# EAGLE board proiect-tsc (EAGLE 9.7.0)
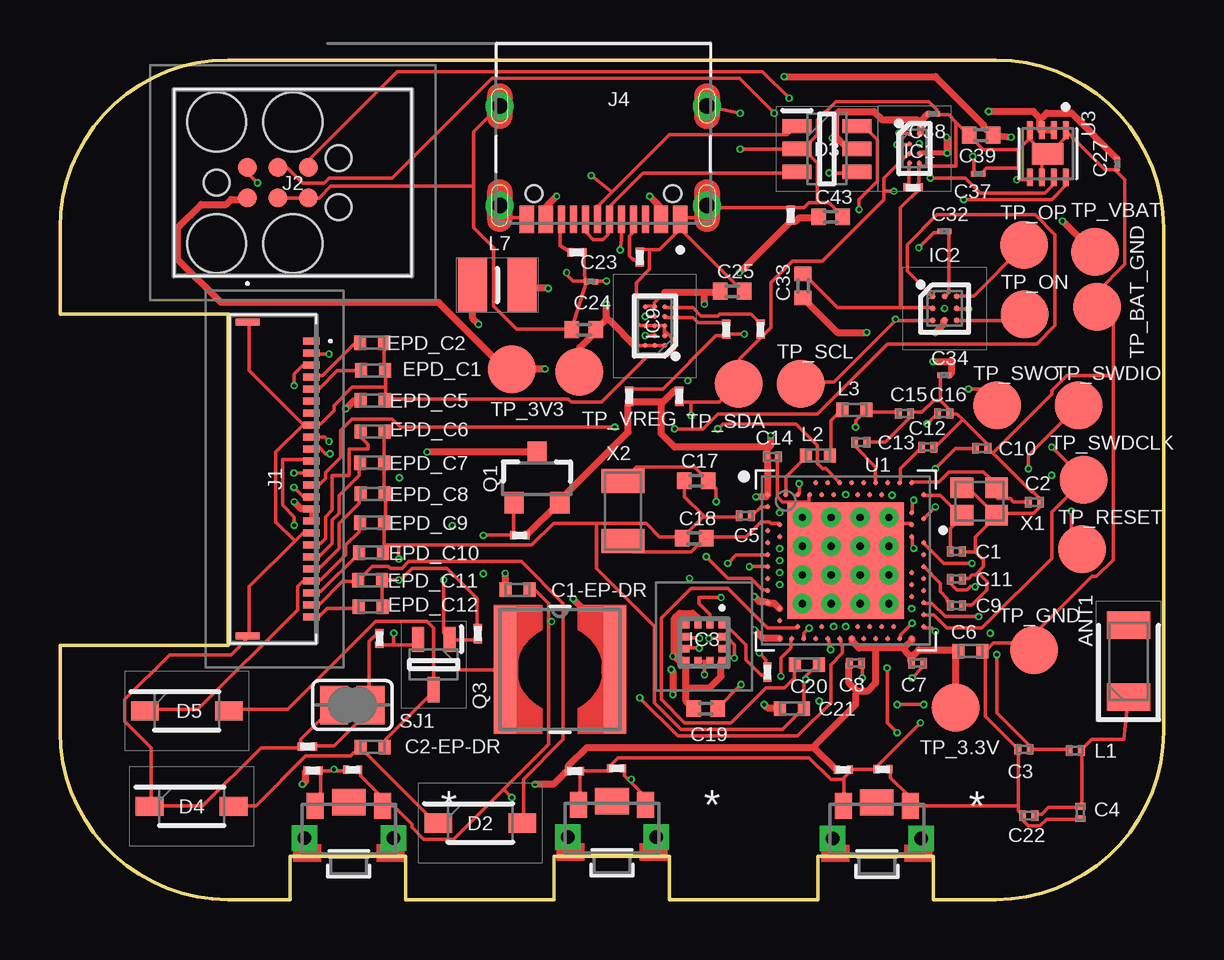
[diagram p0: board, top side]
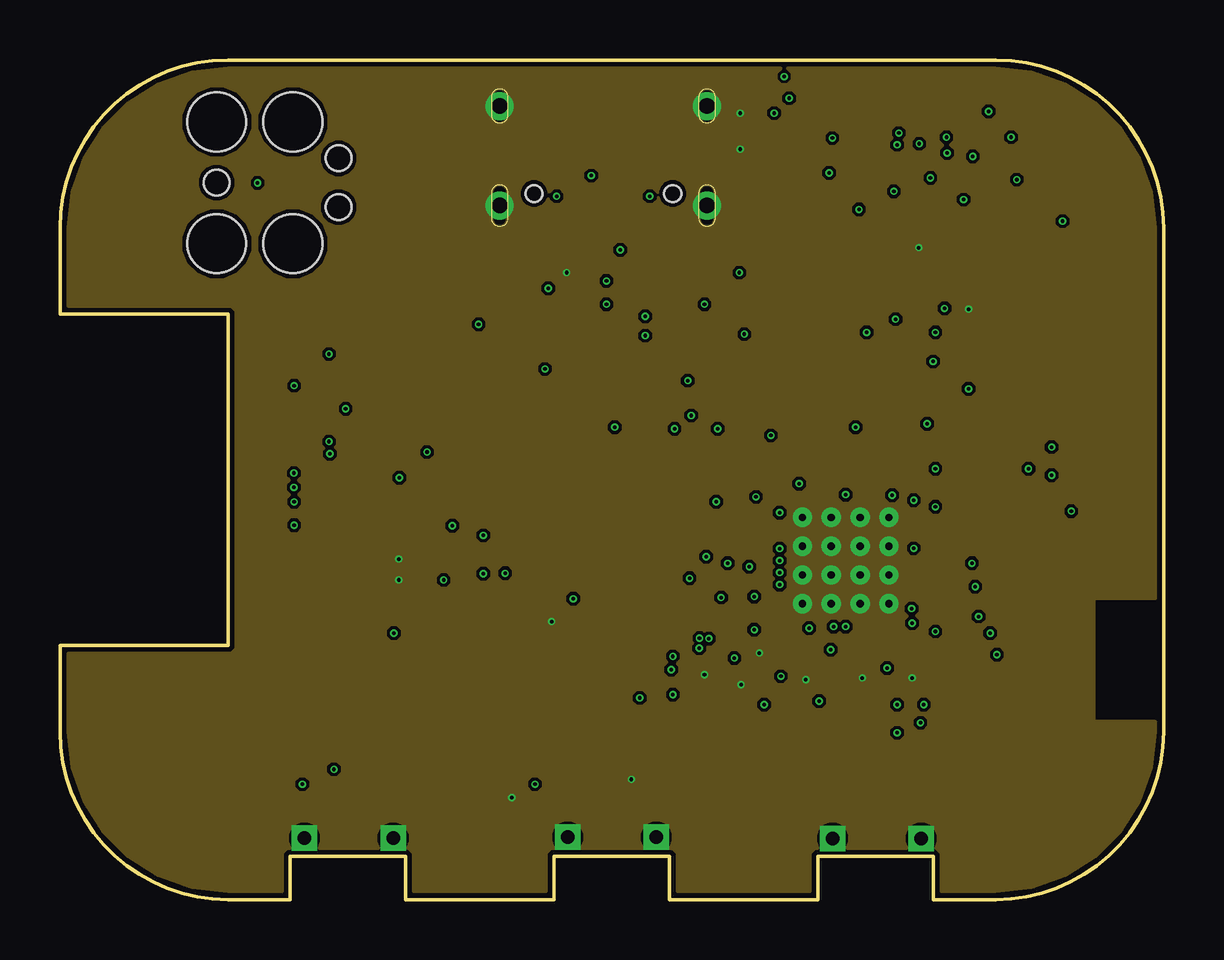
[diagram p1: board, inner layer GND]
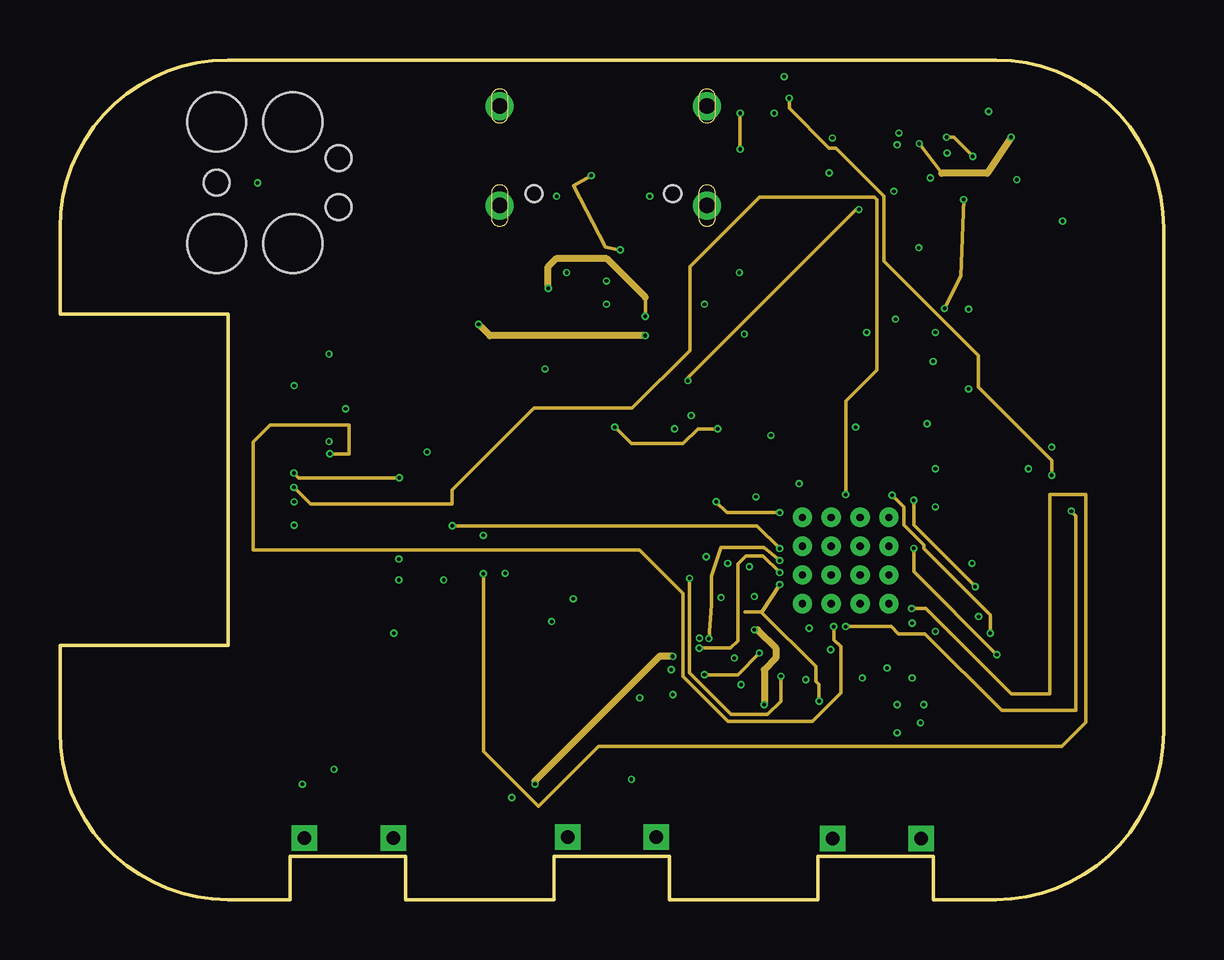
[diagram p2: board, inner layer Route63]
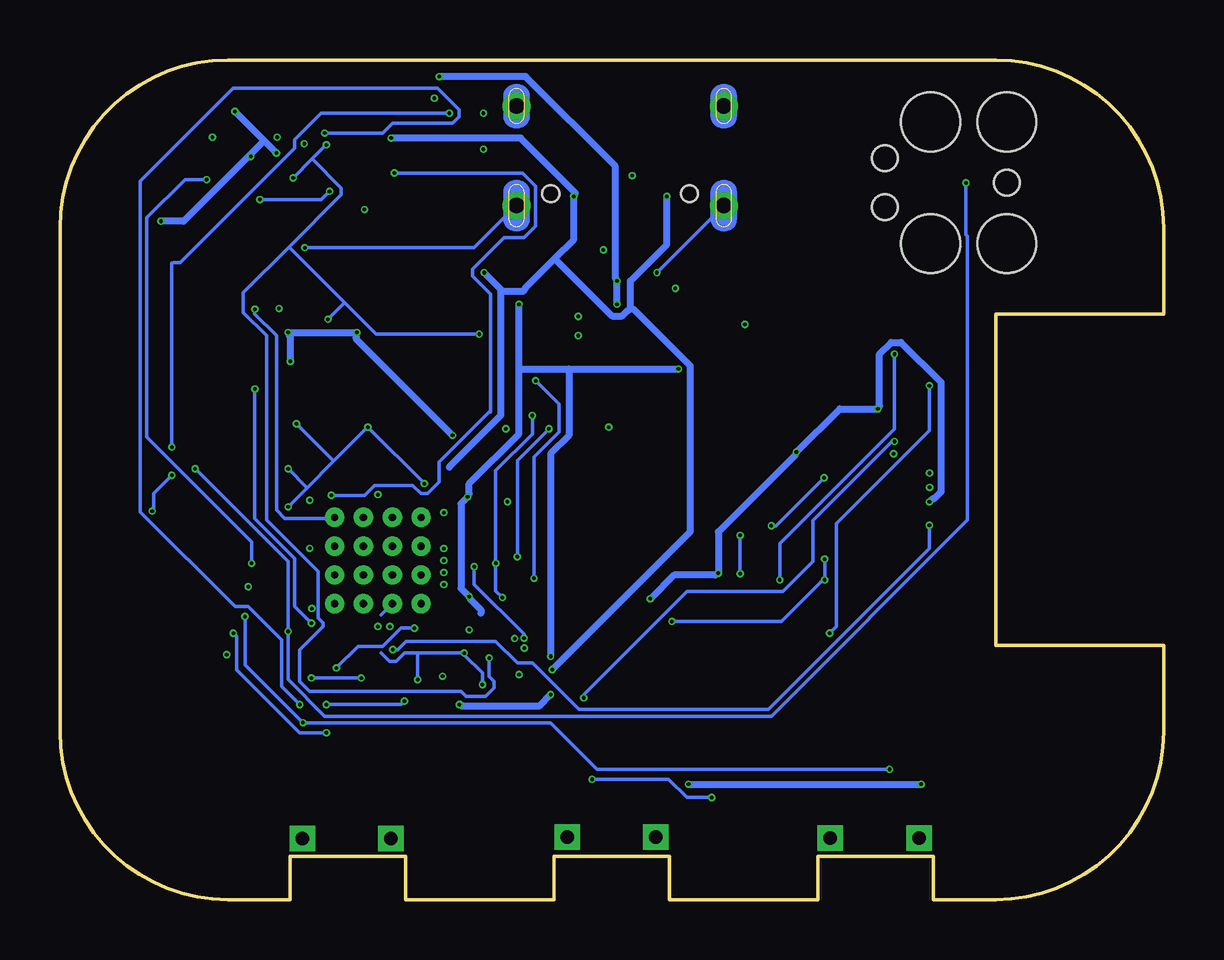
[diagram p3: board, bottom side, seen from below]

Size 46 x 35 mm. Coordinates in mm from the lower left corner, seen from the top.
Outline: 39,0 36.4,0 36.4,1.8 31.6,1.8 31.6,0 25.4,0 25.4,1.8 20.6,1.8 20.6,0 14.4,0 14.4,1.8 9.6,1.8 9.6,0 7,0 arc-90 0,7 0,10.6 7,10.6 7,24.4 0,24.4 0,28 arc-90 7,35 39,35 arc-90 46,28 46,7 arc-90 39,0
Copper layers (1+2*15+16): Top / GND / Route63 / Bottom
Stack-up 4 Layer Stack: Top SilkScreen Epoxy Ink / Top SolderMask SR:Green 0.0254mm Dk 4.3 / Top Surface Finish Lead-Free 0.02mm / Top CuFoil:007 0.035mm / Dielectric-1 Prepreg:001 0.064mm / Dielectric-2 Prepreg:001 0.064mm / GND CuFoil:007 0.035mm / Dielectric-3 User Defined 0.5132mm / Route63 CuFoil:007 0.035mm / Dielectric-4 Prepreg:001 0.064mm / Dielectric-5 Prepreg:001 0.064mm / Bottom CuFoil:007 0.035mm / Bottom Surface Finish Lead-Free 0.02mm / Bottom SolderMask SR:Green 0.0254mm Dk 4.3 / Bottom SilkScreen Epoxy Ink
Design rules: minimum copper width classes=1 0.3mm, minimum copper width 0.15mm, minimum drill size 0.15mm, copper clearance wire_polygon to wire_polygon 5mil, copper clearance wire_polygon to pad_smd 5mil, copper clearance wire_polygon to via 5mil, copper clearance pad_smd to pad_smd 5mil, copper clearance pad_smd to via 5mil, copper clearance via to via 5mil, copper clearance smd to pad (same net) 5mil, copper clearance smd to via (same net) 5mil, copper clearance smd to smd (same net) 5mil, dimension clearance 0.2mm, via restrict clearance 0mil, restrict clearance 0mil, drill distance 6mil, keepout clearance 0mil
Net classes: 1 power: width 0.3 mm
RestrictTop: 4 lines
RestrictBottom: 4 lines
RestrictVias: 4 lines

## Footprints (pad centres in the part's own frame; a part is rotated, then mirrored left to right if it is on the bottom)
2450AT18B100E_ANTC3216X140N = smd 1.15 x 1.8: 1 -1.5,0; 2 1.5,0
NORDIC_NRF_3_RESC0201_L = smd 0.28 x 0.43: 1 -0.255,0; 2 0.255,0
NORDIC_NRF_3_RESC0402_L = smd 0.5 x 0.6: 1 -0.5,0; 2 0.5,0
PERFECT_0402_0402 = smd 0.6 x 0.7: 1 -0.5,0; 2 0.5,0
GRM011R60J152KE01L_2_CAPC0201X13N = smd 0.22 x 0.23: 1 -0.185,0; 2 0.185,0
GRM011R60J152KE01L_1_0201 = smd 0.35 x 0.25: 1 0,0.275; 2 0,-0.275
ESP32_C6_LIBRARY_5_SOD3716X135N = smd 1.15 x 0.8: 1 -1.75,0; 2 1.75,0
ESP32_C6_LIBRARY_3_SOT95P280X145-6N = smd 1.2 x 0.6: 1 -1.25,0.95; 2 -1.25,0; 3 -1.25,-0.95; 4 1.25,-0.95; 5 1.25,0; 6 1.25,0.95
BQ25180YBGR_BGA8C40P2X4_100X155X50 = smd 0.2 x 0.2: A1 -0.2,0.6; A2 0.2,0.6; B1 -0.2,0.2; B2 0.2,0.2; C1 -0.2,-0.2; C2 0.2,-0.2; D1 -0.2,-0.6; D2 0.2,-0.6
DRV2605YZFR_BGA9C50P3X3_144X144X62 = smd 0.25 x 0.25: A1 -0.5,0.5; A2 0,0.5; A3 0.5,0.5; B1 -0.5,0; B2 0,0; B3 0.5,0; C1 -0.5,-0.5; C2 0,-0.5; C3 0.5,-0.5
BMA423_BMA423 = smd 0.3 x 0.35: 1 -0.75,-0.775; 2 -0.25,-0.775; 3 0.25,-0.775; 4 0.75,-0.775; 7 0.75,0.775; 8 0.25,0.775; 9 -0.25,0.775; 10 -0.75,0.775 | smd 0.35 x 0.3: 5 0.775,-0.25; 6 0.775,0.25; 11 -0.775,0.25; 12 -0.775,-0.25
RT6160AWSC_BGA15C40P3X5_140X230X60 = smd 0.216 x 0.216: A1 -0.4,0.8; A2 0,0.8; A3 0.4,0.8; B1 -0.4,0.4; B2 0,0.4; B3 0.4,0.4; C1 -0.4,0; C2 0,0; C3 0.4,0; D1 -0.4,-0.4; D2 0,-0.4; D3 0.4,-0.4; E1 -0.4,-0.8; E2 0,-0.8; E3 0.4,-0.8
503480-2400_5034802400 = smd 0.3 x 0.7: 1 -5.75,1.525; 2 -5.25,1.525; 3 -4.75,1.525; 4 -4.25,1.525; 5 -3.75,1.525; 6 -3.25,1.525; 7 -2.75,1.525; 8 -2.25,1.525; 9 -1.75,1.525; 10 -1.25,1.525; 11 -0.75,1.525; 12 -0.25,1.525; 13 0.25,1.525; 14 0.75,1.525; 15 1.25,1.525; 16 1.75,1.525; 17 2.25,1.525; 18 2.75,1.525; 19 3.25,1.525; 20 3.75,1.525; 21 4.25,1.525; 22 4.75,1.525; 23 5.25,1.525; 24 5.75,1.525 | smd 0.3 x 1: MP1 -6.54,-1.125; MP2 6.54,-1.125
TC2030-IDC_TC2030IDC = smd 0.783 x 0.783: 1 -0.953,-0.635; 2 -0.953,0.635; 3 0.317,-0.635; 4 0.317,0.635; 5 1.588,-0.635; 6 1.588,0.635 | hole 2.451: -2.223,-2.54; -2.223,2.54; 0.952,-2.54; 0.952,2.54 | hole 1.067: -2.223,0; 2.857,-1.016; 2.857,1.016
KH-TYPE-C-16P_KINGHELM_KH-TYPE-C-16P = smd 0.6 x 1.15: A1_B12 -3.2,4.725; A4_B9 -2.4,4.725; A9_B4 2.4,4.725; A12_B1 3.2,4.725 | smd 0.3 x 1.15: A5 -1.25,4.725; A6 -0.25,4.725; A7 0.25,4.725; A8 1.25,4.725; B5 1.75,4.725; B6 0.75,4.725; B7 -0.75,4.725; B8 -1.75,4.725 | drill 0.65 pad 1.05: SH1 -4.32,0; SH2 4.32,0; SH3 -4.32,4.15; SH4 4.32,4.15 | hole 0.7: -2.89,3.65; 2.89,3.65
NORDIC_NRF_2_RESC0201_L = smd 0.28 x 0.43: 1 -0.255,0; 2 0.255,0
NORDIC_NRF_2_RESC0402_L = smd 0.5 x 0.6: 1 -0.5,0; 2 0.5,0
ESP32_C6_LIBRARY_2_IND_4828-WE-TPC_WRE = smd 0.9 x 5.3: 1 -2.286,0; 2 2.286,0
MLP2016SR47MT0S1_INDC2016X100N = smd 1.2 x 2.2: 1 -1.028,0; 2 1.028,0
ESP32_C6_LIBRARY_4_ESP32_C6_LIBRARY_4_ESP32_C6_LIBRARY_4_ESP32_C6_LIBRARY_4_ESP32_WROVER_SPARKFUN-DISCRETESEMI_SOT23-3 = smd 0.8 x 0.9: 1 -0.95,-1; 2 0.95,-1; 3 0,1.1
ESP32_C6_LIBRARY_6_SOT65P210X110-3N = smd 1.05 x 0.5: 1 -1.05,0.65; 2 -1.05,-0.65; 3 1.05,0
CPF0201D7K68C1_0201 = smd 0.35 x 0.25: 1 0,0.275; 2 0,-0.275
ERA-1AEB3401C_0201 = smd 0.35 x 0.25: 1 0,0.275; 2 0,-0.275
ESP32_C6_LIBRARY_7_JUMPER_SJ = smd 1.168 x 1.6: 1 -0.762,0; 2 0.762,0
2025-10-22_07-23-44_LIBRARY_SW_EVP-AKE31A_PAN = smd 0.711 x 1.092: 1 -1.4,-0.972; 2 1.4,-0.972 | drill 0.559 pad 0.914 square: 3 -1.848,0.381; 4 1.848,0.381 | smd 1.397 x 1.092: 5 0,-1.124
HECTOR_WATCH_1_TP20R = smd 2 x 2: TP 0,0
NORDIC_NRF_4_AQFN50P700X700X85_HS-74N = smd 4.85 x 4.85: P$74 0,0 | drill 0.3 pad 0.6: P$75 -1.8,1.8; P$76 -0.6,1.8; P$77 0.6,1.8; P$78 1.8,1.8; P$79 -1.8,0.6; P$80 -0.6,0.6; P$81 0.6,0.6; P$82 1.8,0.6; P$83 -1.8,-0.6; P$84 -0.6,-0.6; P$85 0.6,-0.6; P$86 1.8,-0.6; P$87 -1.8,-1.8; P$88 -0.6,-1.8; P$89 0.6,-1.8; P$90 1.8,-1.8 | smd 0.2 x 0.2: P$A8 -1.25,3.25; P$A10 -0.75,3.25; P$A12 -0.25,3.25; P$A14 0.25,3.25; P$A16 0.75,3.25; P$A18 1.25,3.25; P$A20 1.75,3.25; P$A22 2.25,3.25; P$A23 2.75,3.25; P$AA24 3.25,-2.25; P$AB2 -2.75,-2.5; P$AC5 -2,-2.75; P$AC9 -1,-2.75; P$AC11 -0.5,-2.75; P$AC13 0,-2.75; P$AC15 0.5,-2.75; P$AC17 1,-2.75; P$AC19 1.5,-2.75; P$AC21 2,-2.75; P$AC24 3.25,-2.75; P$AD2 -2.75,-3.25; P$AD4 -2.25,-3.25; P$AD6 -1.75,-3.25; P$AD8 -1.25,-3.25; P$AD10 -0.75,-3.25; P$AD12 -0.25,-3.25; P$AD14 0.25,-3.25; P$AD16 0.75,-3.25; P$AD18 1.25,-3.25; P$AD20 1.75,-3.25; P$AD22 2.25,-3.25; P$AD23 2.75,-3.25; P$B1 -3.25,2.75; P$B3 -2.5,2.75; P$B5 -2,2.75; P$B7 -1.5,2.75; P$B9 -1,2.75; P$B11 -0.5,2.75; P$B13 0,2.75; P$B15 0.5,2.75; P$B17 1,2.75; P$B19 1.5,2.75; P$B24 3.25,2.75; P$C1 -3.25,2.25; P$D2 -2.75,2; P$D23 2.75,2; P$E24 3.25,1.75; P$F2 -2.75,1.5; P$F23 2.75,1.5; P$G1 -3.25,1.25; P$H2 -2.75,1; P$H23 2.75,1; P$J1 -3.25,0.75; P$J24 3.25,0.75; P$K2 -2.75,0.5; P$L1 -3.25,0.25; P$L24 3.25,0.25; P$M2 -2.75,0; P$N1 -3.25,-0.25; P$N24 3.25,-0.25; P$P2 -2.75,-0.5; P$P23 2.75,-0.5; P$R1 -3.25,-0.75; P$R24 3.25,-0.75; P$T2 -2.75,-1; P$T23 2.75,-1; P$U1 -3.25,-1.25; P$U24 3.25,-1.25; P$V23 2.75,-1.5; P$W1 -3.25,-1.75; P$W24 3.25,-1.75; P$Y2 -2.75,-2; P$Y23 2.75,-2
ESP32_C6_LIBRARY_SON50P200X200X80-9N = smd 0.76 x 0.27: 1 -0.985,0.75; 2 -0.985,0.25; 3 -0.985,-0.25; 4 -0.985,-0.75; 5 0.985,-0.75; 6 0.985,-0.25; 7 0.985,0.25; 8 0.985,0.75 | smd 0.9 x 1.3: 9 0,0
NORDIC_NRF_BT-XTAL_2016_N = smd 0.95 x 0.85: 1 -0.725,-0.575; 2 0.725,-0.575; 3 0.725,0.575; 4 -0.725,0.575
NORDIC_NRF_1_XTAL_3215_N = smd 1 x 1.8: 1 -1.25,0; 2 1.25,0

## Placement (x,y rotation side)
ANT1  2450AT18B100E  [2450AT18B100E_ANTC3216X140N]  44.54,9.93 90 top
C1  12pF  [NORDIC_NRF_3_RESC0201_L]  37.36,14.51 0 top
C1-EP-DR  10uF  [NORDIC_NRF_3_RESC0402_L]  19.07,12.91 0 top
C2  12pF  [NORDIC_NRF_3_RESC0201_L]  40.62,16.56 0 top
C2-EP-DR  4.7uF/25V  [NORDIC_NRF_3_RESC0402_L]  13.03,6.36 0 top
C3  1pF  [NORDIC_NRF_3_RESC0201_L]  40.18,6.26 180 top
C4  1pF  [NORDIC_NRF_3_RESC0201_L]  42.53,3.63 270 top
C5  100nF  [NORDIC_NRF_3_RESC0201_L]  28.57,16 180 top
C6  4.7uF  [NORDIC_NRF_3_RESC0402_L]  37.94,10.36 0 top
C7  100nF  [NORDIC_NRF_3_RESC0201_L]  35.75,9.86 0 top
C8  100nF  [NORDIC_NRF_3_RESC0201_L]  33.16,9.86 0 top
C9  820pF  [NORDIC_NRF_3_RESC0201_L]  37.37,12.26 0 top
C10  N.C.  [NORDIC_NRF_3_RESC0201_L]  38.42,18.81 0 top
C11  100pF  [NORDIC_NRF_3_RESC0201_L]  37.36,13.36 0 top
C12  100nF  [NORDIC_NRF_3_RESC0201_L]  36.17,18.86 0 top
C13  N.C.  [NORDIC_NRF_3_RESC0201_L]  33.38,19.06 0 top
C14  4.7uF  [NORDIC_NRF_3_RESC0201_L]  29.69,18.46 0 top
C15  1.0uF  [NORDIC_NRF_3_RESC0201_L]  35.2,20.26 0 top
C16  47nF  [NORDIC_NRF_3_RESC0201_L]  36.84,20.26 0 top
C17  12pF  [PERFECT_0402_0402]  26.52,17.46 0 top
C18  12pF  [PERFECT_0402_0402]  26.43,15.06 0 top
C19  100nF  [PERFECT_0402_0402]  26.91,7.96 0 top
C20  4.7uF  [NORDIC_NRF_3_RESC0402_L]  31.13,9.8 0 top
C21  4.7uF  [NORDIC_NRF_3_RESC0402_L]  30.51,7.96 0 top
C22  N.C.  [NORDIC_NRF_3_RESC0201_L]  40.38,3.5 180 top
C23  0.1uF  [GRM011R60J152KE01L_2_CAPC0201X13N]  22.13,25.76 0 top
C24  10uF  [PERFECT_0402_0402]  21.84,23.76 0 top
C25  22uF  [PERFECT_0402_0402]  28.02,25.36 0 top
C27  0.1uF  [GRM011R60J152KE01L_2_CAPC0201X13N]  44.07,30.66 90 top
C29  1uF  [GRM011R60J152KE01L_1_0201]  34.3,5.43 270 top
C30  1uF  [GRM011R60J152KE01L_1_0201]  12.2,5.41 270 top
C31  1uF  [GRM011R60J152KE01L_1_0201]  23.2,5.47 270 top
C32  1uF  [GRM011R60J152KE01L_2_CAPC0201X13N]  36.87,27.86 0 top
C33  22uF  [PERFECT_0402_0402]  30.97,25.58 90 top
C34  0.1uF  [GRM011R60J152KE01L_2_CAPC0201X13N]  36.86,21.86 0 top
C37  1uF  [GRM011R60J152KE01L_2_CAPC0201X13N]  38.27,30.26 180 top
C38  1uF  [GRM011R60J152KE01L_2_CAPC0201X13N]  36.38,32.76 180 top
C39  10uF  [PERFECT_0402_0402]  38.39,31.86 180 top
C42  0.1uF  [GRM011R60J152KE01L_1_0201]  30.46,28.53 180 top
C43  4.7uF  [PERFECT_0402_0402]  32.12,28.46 0 top
D2  MBR0530  [ESP32_C6_LIBRARY_5_SOD3716X135N]  17.52,3.19 0 top
D3  USBLC6-2SC6Y  [ESP32_C6_LIBRARY_3_SOT95P280X145-6N]  31.97,31.29 0 top
D4  MBR0530  [ESP32_C6_LIBRARY_5_SOD3716X135N]  5.49,3.89 0 top
D5  MBR0530  [ESP32_C6_LIBRARY_5_SOD3716X135N]  5.29,7.87 0 top
EPD_C1  1uF/50V  [NORDIC_NRF_3_RESC0402_L]  13.06,22.06 180 top
EPD_C2  1uF/50V  [NORDIC_NRF_3_RESC0402_L]  13.02,23.21 180 top
EPD_C5  0.1uF/50V  [NORDIC_NRF_3_RESC0402_L]  13.03,20.81 180 top
EPD_C6  1uF/50V  [NORDIC_NRF_3_RESC0402_L]  13.04,19.51 180 top
EPD_C7  1uF/50V  [NORDIC_NRF_3_RESC0402_L]  13.02,18.21 180 top
EPD_C8  1uF/50V  [NORDIC_NRF_3_RESC0402_L]  13.03,16.91 180 top
EPD_C9  1uF/50V  [NORDIC_NRF_3_RESC0402_L]  13.01,15.71 180 top
EPD_C10  1uF/50V  [NORDIC_NRF_3_RESC0402_L]  12.97,14.46 180 top
EPD_C11  1uF/50V  [NORDIC_NRF_3_RESC0402_L]  12.93,13.31 180 top
EPD_C12  1uF/50V  [NORDIC_NRF_3_RESC0402_L]  12.94,12.21 180 top
IC1  BQ25180YBGR  [BQ25180YBGR_BGA8C40P2X4_100X155X50]  35.62,31.31 0 top
IC2  DRV2605YZFR  [DRV2605YZFR_BGA9C50P3X3_144X144X62]  36.87,24.64 0 top
IC3  BMA423  [BMA423_BMA423]  26.85,10.71 180 top
IC9  RT6160AWSC  [RT6160AWSC_BGA15C40P3X5_140X230X60]  24.8,23.91 180 top
J1  503480-2400  [503480-2400_5034802400]  8.95,17.53 270 top
J2  TC2030-IDC  [TC2030-IDC_TC2030IDC]  8.76,29.88 0 top
J4  KH-TYPE-C-16P  [KH-TYPE-C-16P_KINGHELM_KH-TYPE-C-16P]  22.65,33.08 180 top
L1  3.9nH  [NORDIC_NRF_2_RESC0201_L]  42.32,6.21 0 top
L2  10uH  [NORDIC_NRF_2_RESC0402_L]  31.6,18.51 0 top
L3  15nH  [NORDIC_NRF_2_RESC0402_L]  33.11,20.41 0 top
L5  68uH  [ESP32_C6_LIBRARY_2_IND_4828-WE-TPC_WRE]  20.84,9.6 0 top
L7  FTC252012SR47MBCA  [MLP2016SR47MT0S1_INDC2016X100N]  18.23,25.61 0 top
Q1  20V/4.2A/52mΩ/1.4W  [ESP32_C6_LIBRARY_4_ESP32_C6_LIBRARY_4_ESP32_C6_LIBRARY_4_ESP32_C6_LIBRARY_4_ESP32_WROVER_SPARKFUN-DISCRETESEMI_SOT23-3]  19.88,17.54 0 top
Q3  SI1308EDL-T1-GE3  [ESP32_C6_LIBRARY_6_SOT65P210X110-3N]  15.58,9.8 270 top
R1_EP_DR  0.47  [CPF0201D7K68C1_0201]  13.32,10.88 0 top
R1_USB  5K1  [CPF0201D7K68C1_0201]  24.16,26.78 0 top
R2  0  [ERA-1AEB3401C_0201]  29.2,23.78 180 top
R2_EP_DR  10K  [CPF0201D7K68C1_0201]  17.41,11.08 0 top
R2_USB  5K1  [CPF0201D7K68C1_0201]  21.55,26.98 90 top
R3  0  [CPF0201D7K68C1_0201]  29.49,9.48 0 top
R4  0  [ERA-1AEB3401C_0201]  27.77,23.78 180 top
R5  10K  [CPF0201D7K68C1_0201]  10.55,5.37 270 top
R7  10K  [CPF0201D7K68C1_0201]  32.65,5.41 270 top
R8  10K  [CPF0201D7K68C1_0201]  21.45,5.35 270 top
R9  10K  [CPF0201D7K68C1_0201]  35.56,29.68 270 top
R17  3K3  [CPF0201D7K68C1_0201]  23.73,20.98 180 top
R18  3K3  [CPF0201D7K68C1_0201]  25.81,20.98 0 top
R_PWR_EPD  10K  [CPF0201D7K68C1_0201]  19.17,15.18 90 top
R_TYPE_SEL  2.2  [CPF0201D7K68C1_0201]  10.31,6.38 90 top
SJ1  [ESP32_C6_LIBRARY_7_JUMPER_SJ]  12.19,8.11 0 top
SW_DN  2025-10-22_07-23-44_LIBRARY_EVP-AKE31ASW_EVP-AKE31A_PAN  [2025-10-22_07-23-44_LIBRARY_SW_EVP-AKE31A_PAN]  34.05,2.93 180 top
SW_ENT  2025-10-22_07-23-44_LIBRARY_EVP-AKE31ASW_EVP-AKE31A_PAN  [2025-10-22_07-23-44_LIBRARY_SW_EVP-AKE31A_PAN]  23.01,2.98 180 top
SW_UP  2025-10-22_07-23-44_LIBRARY_EVP-AKE31ASW_EVP-AKE31A_PAN  [2025-10-22_07-23-44_LIBRARY_SW_EVP-AKE31A_PAN]  12.04,2.94 180 top
TP_3.3V  HECTOR_WATCH_1_TPTP20R  [HECTOR_WATCH_1_TP20R]  37.33,8 0 top
TP_3V3  HECTOR_WATCH_1_TPTP20R  [HECTOR_WATCH_1_TP20R]  18.84,22.1 0 top
TP_BAT_GND  HECTOR_WATCH_1_TPTP20R  [HECTOR_WATCH_1_TP20R]  43.22,24.7 0 top
TP_GND  HECTOR_WATCH_1_TPTP20R  [HECTOR_WATCH_1_TP20R]  40.6,10.4 0 top
TP_ON  HECTOR_WATCH_1_TPTP20R  [HECTOR_WATCH_1_TP20R]  40.21,24.4 0 top
TP_OP  HECTOR_WATCH_1_TPTP20R  [HECTOR_WATCH_1_TP20R]  40.19,27.3 0 top
TP_RESET  HECTOR_WATCH_1_TPTP20R  [HECTOR_WATCH_1_TP20R]  42.6,14.6 0 top
TP_SCL  HECTOR_WATCH_1_TPTP20R  [HECTOR_WATCH_1_TP20R]  30.88,21.5 0 top
TP_SDA  HECTOR_WATCH_1_TPTP20R  [HECTOR_WATCH_1_TP20R]  28.29,21.5 0 top
TP_SWDCLK  HECTOR_WATCH_1_TPTP20R  [HECTOR_WATCH_1_TP20R]  42.67,17.5 0 top
TP_SWDIO  HECTOR_WATCH_1_TPTP20R  [HECTOR_WATCH_1_TP20R]  42.45,20.6 0 top
TP_SWO  HECTOR_WATCH_1_TPTP20R  [HECTOR_WATCH_1_TP20R]  39.06,20.6 0 top
TP_VBAT  HECTOR_WATCH_1_TPTP20R  [HECTOR_WATCH_1_TP20R]  43.14,27 0 top
TP_VREG  HECTOR_WATCH_1_TPTP20R  [HECTOR_WATCH_1_TP20R]  21.65,22 0 top
U1  NRF52840_QF  [NORDIC_NRF_4_AQFN50P700X700X85_HS-74N]  32.75,14.13 0 top
U3  MAX17048G+T10  [ESP32_C6_LIBRARY_SON50P200X200X80-9N]  41.17,31.09 270 top
X1  32MHZ  [NORDIC_NRF_BT-XTAL_2016_N]  38.32,16.6 0 top
X2  32.768kHz  [NORDIC_NRF_1_XTAL_3215_N]  23.47,16.2 270 top

## Library data of the parts
ANT1 = InkTime_v5; ARROW_PART_NUMBER: 2450AT18B100E; ARROW_PRICE-STOCK: https://www.arrow.com/en/products/2450at18b100e/johanson-dielectrics?utm_currency=USD&region=nac; DESCRIPTION: Antennas 2.45GHz ANTENNA; HEIGHT: 1.4mm; MANUFACTURER_NAME: JOHANSON TECHNOLOGY; MANUFACTURER_PART_NUMBER: 2450AT18B100E; MOUSER_PART_NUMBER: 609-2450AT18B100E; MOUSER_PRICE-STOCK: https://www.mouser.co.uk/ProductDetail/Johanson-Technology/2450AT18B100E?qs=yCnrNFeXz%252Bh5MFsFIXGZGA%3D%3D
C1 C1-EP-DR C2 C2-EP-DR C3-C22 C24 C25 C29-C31 C33 C39 C42 C43 EPD_C1 EPD_C2 EPD_C5-EPD_C12 L1-L3 R1_EP_DR R1_USB R2 R2_EP_DR R2_USB R3-R5 R7-R9 R17 R18 R_PWR_EPD R_TYPE_SEL SJ1 TP_3.3V TP_3V3 TP_BAT_GND TP_GND TP_ON TP_OP TP_RESET TP_SCL TP_SDA TP_SWDCLK TP_SWDIO TP_SWO TP_VBAT TP_VREG U1 X1 X2 = InkTime_v5
C23 C27 C32 C34 C37 C38 = InkTime_v5; AVAILABILITY: In Stock; CHECK_PRICES: https://www.snapeda.com/parts/GRM011R60J152KE01L/Murata/view-part/?ref=eda; DESCRIPTION: SMD Capacitor X5R(EIA) with Capacitance: 1500pF Tol. 10%. Rated Voltage: 6.3Vdc; MF: Murata; MP: GRM011R60J152KE01L; PACKAGE: 0201 Murata; PRICE: None; SNAPEDA_LINK: https://www.snapeda.com/parts/GRM011R60J152KE01L/Murata/view-part/?ref=snap
D2 D4 D5 = InkTime_v5; AVAILABILITY: In Stock; CHECK_PRICES: https://www.snapeda.com/parts/MBR0530/Onsemi/view-part/?ref=eda; DESCRIPTION: Diode Schottky 30 V 500mA Surface Mount SOD-123; MF: ON Semiconductor; MP: MBR0530; PACKAGE: SOD-123-2 ON Semiconductor; PRICE: None; PURCHASE-URL: https://www.snapeda.com/api/url_track_click_mouser/?unipart_id=179458&manufacturer=ON Semiconductor&part_name=MBR0530&search_term=None; SNAPEDA_LINK: https://www.snapeda.com/parts/MBR0530/Onsemi/view-part/?ref=snap
D3 = InkTime_v5; AVAILABILITY: In Stock; CHECK_PRICES: https://www.snapeda.com/parts/USBLC6-2SC6Y/STMicroelectronics/view-part/?ref=eda; DESCRIPTION: 17V Clamp 5A (8/20µs) Ipp Tvs Diode Surface Mount SOT-23-6; MF: STMicroelectronics; MP: USBLC6-2SC6Y; PACKAGE: SOT-23-6 STMicroelectronics; PRICE: None; SNAPEDA_LINK: https://www.snapeda.com/parts/USBLC6-2SC6Y/STMicroelectronics/view-part/?ref=snap
IC1 = InkTime_v5; ARROW_PART_NUMBER: BQ25180YBGR; ARROW_PRICE-STOCK: https://www.arrow.com/en/products/bq25180ybgr/texas-instruments?utm_currency=USD&region=nac; DESCRIPTION: Charger IC Lithium Ion/Polymer, Lithium Iron Phosphate 8-DSBGA (1.6x1.1); HEIGHT: 0.5mm; MANUFACTURER_NAME: Texas Instruments; MANUFACTURER_PART_NUMBER: BQ25180YBGR; MOUSER_PART_NUMBER: 595-BQ25180YBGR; MOUSER_PRICE-STOCK: https://www.mouser.co.uk/ProductDetail/Texas-Instruments/BQ25180YBGR?qs=doiCPypUmgEWjAK%252BJAX6Tw%3D%3D
IC2 = InkTime_v5; ARROW_PART_NUMBER: DRV2605YZFR; ARROW_PRICE-STOCK: https://www.arrow.com/en/products/drv2605yzfr/texas-instruments?region=nac; DESCRIPTION: Haptic Driver for ERM/LRA with Built-In Library and Smart Loop Architecture; HEIGHT: 0.625mm; MANUFACTURER_NAME: Texas Instruments; MANUFACTURER_PART_NUMBER: DRV2605YZFR
IC3 = InkTime_v5; ARROW_PART_NUMBER: BMA423; ARROW_PRICE-STOCK: https://www.arrow.com/en/products/bma423/bosch; DESCRIPTION: Accelerometers Triaxial low-g 12bit Acceleration Sensor; HEIGHT: 1mm; MANUFACTURER_NAME: BOSCH; MANUFACTURER_PART_NUMBER: BMA423; MOUSER_PART_NUMBER: 262-BMA423; MOUSER_PRICE-STOCK: https://www.mouser.co.uk/ProductDetail/Bosch-Sensortec/BMA423?qs=HXFqYaX1Q2xC%252BSgeGoX3mg%3D%3D
IC9 = InkTime_v5; DESCRIPTION: Buck-Boost Regulator Positive Output Step-Up/Step-Down I2C DC-DC Controller IC 15-WL-CSP (BSC) (1.4x2.3); HEIGHT: 0.6mm; MANUFACTURER_NAME: RICHTEK; MANUFACTURER_PART_NUMBER: RT6160AWSC; MOUSER_PART_NUMBER: 835-RT6160AWSC; MOUSER_PRICE-STOCK: https://www.mouser.co.uk/ProductDetail/Richtek/RT6160AWSC?qs=amGC7iS6iy%2FLd9PSoixZXQ%3D%3D
J1 = InkTime_v5; DESCRIPTION: FFC & FPC Connectors 0.5mm FPC RA SMT Dual Contact 24Ckt; HEIGHT: 1.87mm; MANUFACTURER_NAME: Molex; MANUFACTURER_PART_NUMBER: 503480-2400; MOUSER_PART_NUMBER: 538-503480-2400; MOUSER_PRICE-STOCK: https://www.mouser.co.uk/ProductDetail/Molex/503480-2400?qs=OAhjpuo3Vu7efIoxFh9AOw%3D%3D
J2 = InkTime_v5; DESCRIPTION: CABLE ADAPTER 6 POS; HEIGHT: 19mm; MANUFACTURER_NAME: Tag Connect; MANUFACTURER_PART_NUMBER: TC2030-IDC
J4 = InkTime_v5; AVAILABILITY: Not in stock; CHECK_PRICES: https://www.snapeda.com/parts/KH-TYPE-C-16P/Kinghelm/view-part/?ref=eda; MF: kinghelm; MP: KH-TYPE-C-16P; PACKAGE: None; PRICE: None; SNAPEDA_LINK: https://www.snapeda.com/parts/KH-TYPE-C-16P/Kinghelm/view-part/?ref=snap
L5 = InkTime_v5; COPYRIGHT: Copyright (C) 2024 Ultra Librarian. All rights reserved.; MANUFACTURER_PART_NUMBER: 744043680; MFR_NAME: Wurth Electronics
L7 = InkTime_v5; DESCRIPTION: SMD / SMT Inductors (Coils), L=0.47?H, L x W x T :; HEIGHT: 1mm; JLCPCB: https://jlcpcb.com/partdetail/6763488-FTC252012SR47MBCA/C5832368; MANUFACTURER_NAME: TDK; MANUFACTURER_PART_NUMBER: FTC252012SR47MBCA
Q1 = InkTime_v5; PROD_ID: TRAN-14388
Q3 = InkTime_v5; AVAILABILITY: In Stock; CHECK_PRICES: https://www.snapeda.com/parts/SI1308EDL-T1-GE3/Vishay+Siliconix/view-part/?ref=eda; DESCRIPTION: Si1308EDL-T1-GE3 N-channel MOSFET Transistor, 1.5 A, 30 V, 3-Pin SC-70 | Siliconix / Vishay SI1308EDL-T1-GE3; MF: Vishay Siliconix; MP: SI1308EDL-T1-GE3; PACKAGE: SOT-323 Vishay Semiconductor; PRICE: None; PURCHASE-URL: https://www.snapeda.com/api/url_track_click_mouser/?unipart_id=274603&manufacturer=Vishay Siliconix&part_name=SI1308EDL-T1-GE3&search_term=None; SNAPEDA_LINK: https://www.snapeda.com/parts/SI1308EDL-T1-GE3/Vishay+Siliconix/view-part/?ref=snap
SW_DN SW_ENT SW_UP = InkTime_v5; COPYRIGHT: Copyright (C) 2025 Ultra Librarian. All rights reserved.; DIGI-KEY_PART_NUMBER_1: P123437TR-ND; DIGI-KEY_PART_NUMBER_2: P123437CT-ND; DIGI-KEY_PART_NUMBER_3: P123437DKR-ND; MANUFACTURER_NAME: Panasonic; MANUFACTURER_PART_NUMBER: EVP-AKE31A
U3 = InkTime_v5; AVAILABILITY: In Stock; CHECK_PRICES: https://www.snapeda.com/parts/MAX17048G+T10/Analog+Devices/view-part/?ref=eda; DESCRIPTION: 3µA 1-Cell/2-Cell Fuel Gauge with ModelGauge; MF: Analog Devices; MP: MAX17048G+T10; PACKAGE: TDFN-8 Maxim; PRICE: None; PURCHASE-URL: https://www.snapeda.com/api/url_track_click_mouser/?unipart_id=329239&manufacturer=Analog Devices&part_name=MAX17048G+T10&search_term=None; SNAPEDA_LINK: https://www.snapeda.com/parts/MAX17048G+T10/Analog+Devices/view-part/?ref=snap

## Nets
3V3 [power]: C6.1 C7.1 C8.1 C14.1 C19.1 C25.1 C33.1 C34.2 IC2.C2 IC3.3 IC3.7 IC3.10 IC9.E2 IC9.E3 J2.1 Q1.2 R5.2 R7.2 R8.2 R17.1 R18.1 R_PWR_EPD.2 TP_3.3V.TP TP_3V3.TP U1.P$AD14 U1.P$AD23 U1.P$B1 U1.P$W1 U1.P$Y2
ALERT: U1.P$J24 U3.5
D+: D3.4 U1.P$AD6
D-: D3.6 U1.P$AD4
DEC4_6: C10.1 C15.1 C16.1 L3.2 U1.P$B5 U1.P$E24
DN: D3.1 J4.A7 J4.B7
DP: D3.3 J4.A6 J4.B6
EPD_3V3 [power]: C1-EP-DR.1 EPD_C5.2 J1.15 J1.16 L5.2 Q1.3
EPD_BUSY: J1.9 U1.P$AD12
EPD_CS: J1.12 U1.P$K2
EPD_DC: J1.11 U1.P$AD10
EPD_RST: J1.10 U1.P$AC11
GDR: J1.2 Q3.1 R2_EP_DR.2
GND: C1-EP-DR.2 C1.2 C2.2 C3.2 C4.2 C5.2 C6.2 C7.2 C8.2 C9.2 C10.2 C11.2 C12.2 C13.2 C14.2 C15.2 C16.2 C17.1 C18.1 C19.2 C20.2 C21.2 C22.2 C23.1 C24.1 C25.2 C27.1 C29.1 C30.1 C31.1 C32.1 C33.2 C34.1 C37.1 C38.1 C39.2 C42.2 C43.2 D3.2 D4.1 EPD_C1.1 EPD_C2.1 EPD_C5.1 EPD_C6.1 EPD_C7.1 EPD_C8.1 EPD_C9.1 EPD_C10.1 EPD_C11.1 EPD_C12.1 IC1.D2 IC2.B1 IC2.B3 IC3.8 IC3.9 IC9.B1 IC9.C1 IC9.C2 IC9.C3 J1.8 J1.17 J1.MP1 J1.MP2 J2.3 J2.5 J4.A1_B12 J4.A12_B1 J4.SH1 J4.SH2 J4.SH3 J4.SH4 R1_USB.1 R2_EP_DR.1 R2_USB.2 R3.1 R9.1 R_TYPE_SEL.1 SJ1.1 SW_DN.1 SW_ENT.1 SW_UP.1 TP_BAT_GND.TP TP_GND.TP U1.P$74 U1.P$75 U1.P$76 U1.P$77 U1.P$78 U1.P$79 U1.P$80 U1.P$81 U1.P$82 U1.P$83 U1.P$84 U1.P$85 U1.P$86 U1.P$87 U1.P$88 U1.P$89 U1.P$90 U1.P$B7 U1.P$F23 U3.1 U3.4 U3.6 U3.9 X1.2 X1.4
HAPTIC_EN: IC2.A1 U1.P$U1
IMU_INT1: IC3.5 U1.P$N1
IMU_INT2: IC3.6 U1.P$P2
LX1 [power]: IC9.B2 IC9.B3 L7.1
LX2 [power]: IC9.D2 IC9.D3 L7.2
MOSI: J1.14 U1.P$B13
N$1: IC1.D1 R9.2
N$2: C11.1 U1.P$D23
N$3: IC9.D1 R4.2
N$4: IC9.E1 R2.2
N$5: C18.2 U1.P$F2 X2.2
N$6: C17.2 U1.P$D2 X2.1
N$7: IC3.1 R3.2
N$8: C5.1 U1.P$C1
N$9: L2.1 U1.P$B3
N$10: L2.2 L3.1
N$11: C12.1 U1.P$A22
N$12: C13.1 U1.P$A18
N$13: C2.1 U1.P$A23 X1.3
N$14: C1.1 U1.P$B24 X1.1
N$15: C3.1 L1.1 U1.P$H23
N$16: ANT1.1 C4.1 C22.1 L1.2
N$17: C9.1 U1.P$N24
N$18: C2-EP-DR.2 D5.2 L5.1 Q3.3
N$19: C20.1 U1.P$AC5
N$20: C2-EP-DR.1 D2.1 D4.2
N$21: R1_EP_DR.1 R_TYPE_SEL.2 SJ1.2
N$22: EPD_C2.2 J1.4
N$23: EPD_C7.2 J1.19
N$24: EPD_C1.2 J1.5
N$25: C32.2 IC2.A2
N$26: EPD_C12.2 J1.24
N$27: J4.B5 R2_USB.1
N$28: EPD_C8.2 J1.20
N$29: EPD_C10.2 J1.22
N$30: EPD_C6.2 J1.18
N$31: J4.A5 R1_USB.2
OUT+: IC2.A3 TP_OP.TP
OUT-: IC2.C3 TP_ON.TP
P0.04: U1.P$J1
P0.09: U1.P$L24
P0.13: U1.P$AD8
P0.14: U1.P$AC9
P0.19: U1.P$AC15
P0.20: U1.P$AD16
P0.21: U1.P$AC17
P0.22: U1.P$AD18
P0.23: U1.P$AC19
P0.24: U1.P$AD20
P0.25: U1.P$AC21
P0.26: U1.P$G1
P0.27: U1.P$H2
P0.28: U1.P$B11
P0.29: U1.P$A10
P0.30: U1.P$B9
P0.31: U1.P$A8
P1.01: Q1.1 R_PWR_EPD.1 U1.P$Y23
P1.02: C29.2 C30.2 C31.2 R5.1 R7.1 R8.1 SW_DN.2 SW_ENT.2 SW_UP.2 U1.P$W24
P1.03: U1.P$V23
P1.04: U1.P$U24
P1.05: U1.P$T23
P1.06: U1.P$R24
P1.07: U1.P$P23
P1.09: U1.P$R1
P1.10: U1.P$A20
P1.11: U1.P$B19
P1.12: U1.P$B17
P1.13: U1.P$A16
P1.14: U1.P$B15
P1.15: U1.P$A14
PMIC_INT: IC1.A1 U1.P$T2
PREVGH: D5.1 EPD_C9.2 J1.21
PREVGL: D2.2 EPD_C11.2 J1.23
RESE: J1.3 Q3.2 R1_EP_DR.2
RESET: J2.6 TP_RESET.TP U1.P$AC13
SCK: J1.13 U1.P$A12
SCL: IC1.B1 IC2.C1 IC3.12 R4.1 R17.2 TP_SCL.TP U1.P$M2 U3.7
SDA: IC1.C1 IC2.B2 IC3.2 R2.1 R18.2 TP_SDA.TP U1.P$L1 U3.8
SWDCLK: J2.4 TP_SWDCLK.TP U1.P$AA24
SWDIO: J2.2 TP_SWDIO.TP U1.P$AC24
SWO: TP_SWO.TP U1.P$AD22
VBAT [power]: C27.2 C37.2 IC1.C2 TP_VBAT.TP U3.2 U3.3
VBUS [power]: C21.1 C38.2 C42.1 C43.1 D3.5 IC1.A2 J4.A4_B9 J4.A9_B4 U1.P$AD2
VREG [power]: C23.2 C24.2 C39.1 IC1.B2 IC9.A1 IC9.A2 IC9.A3 TP_VREG.TP

## Tracks (layer width: path | path; a pad name or v marks a point on that pad's centre or on a via)
3V3  (via drill 0.15, 0.15 pad 0.3)
  Top 0.15: 24.79,24.75 24.44,24.75 IC9.E3 | 24.79,24.75 IC9.E2 | 25.2,25.3 24.79,24.89 24.79,24.75
  Top 0.3: 35.17,10.48 34,10.48 | 34,10.48 33.31,10.48 33.03,10.76 33.03,10.83 U1.P$AD14 | 35.17,10.48 35.52,10.83 U1.P$AD23 | 33.24,8.68 32.89,9.03 C8.1 | 33.24,8.68 33.65,8.68 34,9.03 34,10.48 | 35.45,10.14 35.45,9.93 C7.1 | 35.45,10.14 35.24,10.34 35.17,10.48 | 35.45,10.14 35.59,10.21 35.8,10.41 37.39,10.41 C6.1 37.32,10.28 37.32,8.06 TP_3.3V.TP | R8.2 21.19,5.57 21.95,6.33 31.44,6.33 | 31.44,6.33 32.34,5.43 R7.2 | R8.2 | v10.11,4.8 10.25,4.94 10.25,5.36 R5.2 | v19.8,4.8 20.56,4.8 21.05,5.29 R8.2 | 33.24,8.68 33.17,8.54 33.17,8.13 31.5,6.47 31.44,6.33 | J2.1 7.75,29.18 7.13,29.18 6.92,28.97 5.88,28.97 4.91,28 4.91,26.69 6.71,24.89 15.79,24.89 18.55,22.12 18.83,22.12 TP_3V3.TP 18.97,22.12 v20.22,22.12 | 25.06,20.73 25.13,20.73 25.62,21.22 25.76,21.22 R18.1 | 25.06,20.73 23.75,20.73 R17.1 23.68,20.59 23.68,19.48 20.84,16.65 Q1.2 20.77,16.51 19.45,15.19 R_PWR_EPD.2 | v36.49,23.64 36.84,23.99 36.84,24.12 IC2.C2 | v33.62,23.64 32.41,23.64 31.02,25.03 C33.1 | 26.1,8.82 26.1,8.27 26.38,7.99 C19.1 | 26.1,8.82 IC3.7 25.96,10 25.76,10 25.62,10.14 | 25.62,10.14 25.62,11.73 25.83,11.94 26.38,11.94 26.59,11.73 26.59,11.52 IC3.3 | 26.1,8.82 27.07,8.82 27.56,9.31 27.56,9.93 IC3.10 | 26.86,25.3 27.49,25.3 C25.1 | 26.86,25.3 25.2,25.3 | U1.P$Y2 29.98,12.14 29.77,12.35 29.57,12.35 U1.P$W1 29.36,12.42 29.15,12.42 v28.94,12.63 | 29.5,16.92 29.5,18.45 C14.1 29.5,18.59 29.5,18.79 | 29.5,16.92 U1.P$B1 | v29.01,16.79 29.43,16.79 29.5,16.92 | v26.86,24.82 26.86,25.3 | v25.55,10.14 25.62,10.14 | v29.63,19.35 29.63,18.93 29.5,18.79 | 25.06,20.73 25.06,19.42 25.62,18.86 29.36,18.86 29.5,18.79 | v36.4,22.43 37.15,22.43 37.15,21.93 C34.2
  Route63 0.3: v19.8,4.8 19.8,4.94 25,10.14 v25.55,10.14
  Bottom 0.3: v19.8,4.8 v10.11,4.8 | 26.86,22.12 26.86,19.42 28.94,17.34 28.94,16.92 v29.01,16.79 29.29,16.51 29.29,12.98 v28.94,12.63 28.87,12.49 28.46,12.08 28.46,11.94 | 26.86,22.12 v26.86,24.82 | v29.63,19.35 33.65,23.36 v33.62,23.64 v36.49,23.64 36.4,23.43 v36.4,22.43 | 26.86,22.12 24.79,22.12 | 24.79,22.12 v20.22,22.12 | v25.55,10.14 25.55,18.59 24.79,19.35 24.79,22.12
ALERT  (via drill 0.15)
  Top 0.15: v38.01,14.02 36.84,14.02 36.01,14.85 U1.P$J24 | v39.88,30.01 40.3,30.01 40.37,30.08 U3.5
  Bottom 0.15: v38.01,14.02 38.01,14.91 42.38,19.28 42.38,28.42 40.78,30.01 v39.88,30.01
D+  (via drill 0.15)
  Top 0.15: v31.23,11.31 31.02,11.11 31.02,10.9 U1.P$AD6 | v32.06,30.29 33.17,30.29 D3.4 | v34.48,9.65 34.48,7.37 v34.9,6.95
  Route63 0.15: v38.78,11.11 38.78,11.87 36.01,14.64 36.01,14.78 35.17,15.61 35.17,16.37 v34.69,16.85
  Bottom 0.15: v32.06,30.29 26.73,30.29 26.17,29.73 26.17,28.07 26.66,27.59 27.49,27.59 28.8,26.27 28.8,26 28.04,25.23 28.04,20.32 28.11,20.32 30.19,18.24 30.19,17.41 30.67,16.92 30.95,16.92 31.3,17.27 32.89,17.27 33.31,16.85 v34.69,16.85 | v31.23,11.31 31.78,11.31 32.54,10.55 33.58,10.55 v34.48,9.65 | v34.9,6.95 36.01,6.95 38.64,9.58 38.64,10.97 v38.78,11.11
D-  (via drill 0.15)
  Top 0.15: v30.05,9.31 30.05,10.07 30.47,10.48 30.47,10.83 U1.P$AD4 | v33.31,28.77 33.31,29.18 34.07,29.94 34.07,31.67 33.51,32.23 33.24,32.23 D3.6
  Route63 0.15: v30.05,9.31 30.05,8.27 29.5,7.71 27.97,7.71 26.24,9.44 v26.24,13.39 | v26.17,21.63 26.17,21.77 33.17,28.77 v33.31,28.77
  Bottom 0.15: v26.24,13.39 26.24,18.45 25.2,19.48 25.2,20.66 v26.17,21.63
DEC4_6  (via drill 0.15)
  Top 0.15: v30.81,17.34 30.81,16.92 U1.P$B5 | v33.17,19.69 33.17,19.97 33.58,20.39 L3.2 33.58,20.32 34.9,20.32 C15.1 | v36.49,16.37 U1.P$E24 | v36.14,19.83 36.56,20.25 C16.1 | v36.49,17.96 37.32,18.79 38.15,18.79 C10.1
  Bottom 0.15: v30.81,17.34 v33.17,19.69 34.59,18.27 | 34.59,18.27 35.7,17.17 | 35.7,17.17 v36.49,16.37 | 34.59,18.27 v36.14,19.83 | 35.7,17.17 v36.49,17.96
DN  (via drill 0.15, 0.15 pad 0.3)
  Top 0.15: 23.01,29.48 25.41,31.88 30.33,31.88 30.67,32.23 D3.1 | 23.01,29.48 22.43,28.9 22.43,28.42 J4.A7 22.36,28.9 | 23.33,28.35 J4.B7 23.4,27.5 v23.35,27.08 | v22.15,30.18 23.01,29.48
  Route63 0.15: v23.35,27.08 22.74,27.2 21.4,29.77 v22.15,30.18
DP
  Top 0.15: J4.B6 21.95,28.35 21.95,27.8 22.23,27.52 22.64,27.52 22.85,27.73 22.85,28.35 J4.A6 22.92,28.42 22.92,28.9 24.3,30.29 30.67,30.29 D3.3
EPD_3V3  (via drill 0.15)
  Top 0.3: J1.16 10.52,15.82 10.52,16.23 J1.15 10.38,16.3 10.04,16.3 v9.76,16.58 | v11.91,20.45 12.25,20.8 12.46,20.8 EPD_C5.2 | v15.3,18.65 19.87,18.65 Q1.3 | v18.55,13.6 18.55,12.98 C1-EP-DR.1 | v21.39,12.54 23.13,10.81 23.13,9.65 L5.2
  Bottom 0.3: v21.39,12.54 20.4,13.53 18.69,13.53 v18.55,13.6 18.55,15.33 15.37,18.52 v15.3,18.65 13.5,20.45 v11.91,20.45 11.84,20.59 11.84,22.74 11.35,23.23 10.94,23.23 9.28,21.56 9.28,16.99 9.55,16.71 9.62,16.71 v9.76,16.58
EPD_BUSY  (via drill 0.15)
  Top 0.15: v24.16,8.41 25.76,6.81 30.74,6.81 32.13,8.2 32.13,9.79 32.61,10.28 32.61,10.55 32.54,10.62 32.54,10.83 U1.P$AD12 | v11.21,19.09 11.03,19.28 10.52,19.28 J1.9
  Bottom 0.15: v24.16,8.41 24.16,8.54 19.87,12.84 15.85,12.84 14.61,14.08 14.61,15.8 11.31,19.09 v11.21,19.09
EPD_CS  (via drill 0.15 pad 0.3)
  Top 0.15: v9.75,17.78 J1.12
  Route63 0.15: 29.95,14.68 U1.P$K2 29.05,15.58 v16.35,15.58 | v14.15,17.58 9.95,17.58 v9.75,17.78
  Bottom 0.15: v16.35,15.58 16.15,15.58 v14.15,17.58
  other vias: 30,14.63
EPD_DC  (via drill 0.15)
  Top 0.15: v32.13,10.41 32.06,10.48 32.06,10.83 U1.P$AD10 | v9.76,15.61 9.76,15.95 9.28,16.44 9.28,18.34 10.42,18.34 J1.11
  Bottom 0.15: v32.13,10.41 31.92,10.41 31.57,10.76 27.83,10.76 26.93,9.86 26.31,9.86 24.37,7.92 16.48,7.92 9.76,14.64 v9.76,15.61
EPD_RST  (via drill 0.15 pad 0.3)
  Top 0.15: v11.25,18.58 11.08,18.58 10.78,18.88 10.58,18.88 J1.10
  Route63 0.15: v11.25,18.58 12.05,18.58 12.05,19.78 8.75,19.78 8.05,19.08 8.05,14.58 24.15,14.58 24.16,14.57 25.96,12.77 25.96,9.31 27.83,7.44 31.37,7.44 32.54,8.61 32.54,10.55 32.27,10.83 32.27,11.31 U1.P$AC11
  other vias: 32.25,11.38
GDR  (via drill 0.15)
  Top 0.15: R2_EP_DR.2 17.38,10.83 16.27,10.83 Q3.1 16.2,10.9 15.99,11.11 v15.99,13.32 | v11.21,22.74 10.52,22.74 J1.2
  Bottom 0.15: v11.21,22.74 11.21,19.62 15.99,14.84 v15.99,13.32
GND  (via drill 0.15, 0.15 pad 0.3)
  Top 0.15: C13.2 33.65,19.07 34.41,19.07 35.45,20.11 35.45,20.25 C15.2 35.52,20.32 35.94,20.32 36.42,20.8 36.7,20.8 | 36.7,20.8 36.7,21.84 C34.1 | 36.7,20.8 37.05,20.45 37.05,20.32 C16.2 37.11,20.25 37.39,20.25 37.63,20 | 37.63,20 38.64,19 38.64,18.86 C10.2 38.71,18.79 38.88,18.62 | 37.63,20 36.49,18.86 C12.2 | 38.26,13.63 38.5,13.88 38.5,14.15 38.15,14.5 | 38.26,13.63 38.15,13.53 38.01,13.53 37.88,13.39 37.67,13.39 C11.2 | 38.15,14.5 37.67,14.5 C1.2 | 38.26,13.63 38.64,13.25 38.64,12.91 38.01,12.28 37.67,12.28 C9.2 | X1.2 39.05,16.09 40.58,16.09 40.85,16.37 40.85,16.51 C2.2 40.85,16.58 40.85,16.71 40.58,16.99 40.51,16.99 38.88,18.62 | X1.4 37.6,17.13 37.88,17.13 38.98,16.02 X1.2 | 38.15,14.5 38.15,15.12 38.98,15.95 X1.2 | C29.1 34.62,5.43 34.62,5.08 35.38,4.32 35.38,3.9 SW_DN.1 35.52,3.9 39.95,3.9 | 39.95,3.9 39.95,3.7 40.09,3.56 C22.2 40.16,3.49 40.16,3.28 40.37,3.07 40.85,3.07 41.13,3.35 42.52,3.35 C4.2 | 39.95,3.9 39.95,6.26 C3.2 39.88,6.33 38.57,7.64 38.57,10.34 C6.2 38.5,10.41 38.64,10.41 38.91,10.69 40.3,10.69 40.58,10.41 TP_GND.TP 40.3,10.76 43,13.46 43.21,13.46 43.9,14.15 43.9,21.84 | 35.04,24.68 32.41,24.68 31.02,26.06 C33.2 | 35.04,24.68 36.35,24.68 IC2.B1 | 35.8,30.58 35.8,29.73 R9.1 35.87,29.66 35.04,28.83 35.04,24.68 | 35.8,30.58 35.8,30.7 IC1.D2 35.87,30.63 | C37.1 38.43,30.29 38.62,30.48 39.95,30.48 39.95,31.25 39.95,31.26 | 37.35,32.41 37.88,31.88 C39.2 37.95,31.81 38.5,31.26 39.95,31.26 | 37.35,32.41 37.05,32.71 36.63,32.71 C38.1 36.56,32.78 36.56,32.92 36.21,33.27 32.34,33.27 31.57,32.51 31.57,31.88 31.02,31.33 D3.2 | 44.04,30.43 43.55,30.43 41.96,32.02 U3.1 42.03,31.88 41.2,31.05 U3.9
  Top 0.15: 44.04,30.43 C27.1 | U3.6 40.92,30.15 40.92,30.84 41.13,31.05 U3.9 | 40.44,31.67 40.44,32.02 U3.4 | 40.44,31.67 41.06,31.05 U3.9 | 44.04,30.43 44.04,30.36 44.39,30.01 44.39,26.48 43.28,25.37 43.28,24.75 TP_BAT_GND.TP 43.28,24.68 43.9,24.06 43.9,21.84 | 39.95,31.26 40.37,31.67 40.44,31.67 | 38.88,18.62 41.34,21.08 41.34,21.22 41.96,21.84 43.9,21.84 | 23.78,4.91 24.37,4.32 24.37,3.97 SW_ENT.1 | 23.78,4.91 23.54,5.15 23.54,5.43 C31.1 | C30.1 12.53,5.36 12.53,5.15 13.43,4.25 13.43,3.97 SW_UP.1 13.5,3.9 13.92,3.9 14.68,3.14 14.68,3 15.16,2.52 16.41,2.52 18.49,4.6 | 20.36,11.59 20.36,6.47 18.49,4.6 | 20.36,11.59 20.36,12.35 19.8,12.91 19.59,12.91 C1-EP-DR.2 | v23.82,5.01 23.82,4.94 23.78,4.91 | 18.49,4.6 v18.83,4.25 | R2_EP_DR.1 17.38,11.38 17.38,12.56 16.13,13.81 14.68,13.81 14.19,13.32 v14.12,13.32 13.43,13.32 EPD_C11.1 13.43,13.25 EPD_C12.1 | 26.8,15.95 28.25,15.95 C5.2 | 26.8,15.95 25.96,15.12 C18.1 25.9,15.12 25,15.12 24.44,15.68 22.36,15.68 | C17.1 26.03,17.41 26.03,16.79 26.8,16.02 26.8,15.95 | EPD_C6.1 13.5,19.48 13.5,18.24 EPD_C7.1 13.5,18.17 13.5,16.92 EPD_C8.1 13.57,16.85 13.57,15.75 EPD_C9.1 13.5,15.68 13.5,14.78 | 13.5,14.78 13.5,14.5 EPD_C10.1 | 22.36,15.68 20.56,15.68 19.66,14.78 14.12,14.78 | 13.5,14.78 14.12,14.78 | 14.12,14.78 v14.12,14.19 | v20.49,11.59 20.36,11.59 | SJ1.1 11.42,8.06 10.04,6.67 10.04,6.4 R_TYPE_SEL.1 9.97,6.33 8.38,6.33 5.95,3.9 3.81,3.9 D4.1 3.81,3.97 3.81,6.33 2.7,7.44 2.7,8.34 4.57,10.21 7.13,10.21 7.89,10.97 J1.MP2 7.89,11.04 7.89,13.04 9.79,14.95 | 9.79,14.95 10.11,15.26 10.45,15.26 J1.17 | 13.57,21.36 13.57,22.05 EPD_C1.1 13.5,22.12 13.5,23.16 EPD_C2.1
  Top 0.15: 13.57,21.36 13.57,20.87 EPD_C5.1 13.64,20.87 21.19,20.87 21.32,20.73 22.57,20.73 24.51,22.67 25.34,22.67 25.62,22.95 25.62,23.29 25.27,23.64 25.2,23.64 | 13.57,21.36 12.18,21.36 11.42,20.59 11.42,20.39 10.87,19.83 10.52,19.83 J1.8 10.45,19.83 10.11,19.83 | 10.11,19.83 7.89,22.05 7.89,24.06 J1.MP1 | 9.79,14.95 9,15.75 9,18.65 10.11,19.76 10.11,19.83 | 31.23,16.58 31.23,16.23 30.95,15.95 | 31.23,16.58 31.23,16.85 U1.P$B7 | U1.P$F23 35.45,15.68 34.76,15.68 34.55,15.88 U1.P$74 30.95,15.95 | 31.23,16.58 30.12,16.58 29.91,16.79 29.91,18.45 C14.2 | 25.2,23.64 25.2,23.85 IC9.C1 25.13,23.92 24.86,23.92 IC9.C2 24.79,23.92 24.44,23.92 IC9.C3 24.37,23.92 24.2,23.92 24.03,24.09 24.03,25.72 24.58,26.27 24.58,27.1 | 25.2,23.64 25.2,23.57 IC9.B1 | 24.58,27.1 25,27.1 25.83,27.93 25.83,28.35 J4.A1_B12 | 24.58,27.1 24.16,27.1 R1_USB.1 | C25.2 28.46,25.37 25.9,27.93 J4.A1_B12 | 31.57,29.04 32.06,29.04 32.61,28.49 C43.2 | 31.57,29.04 31.23,29.04 31.02,28.83 30.47,28.83 C42.2 30.4,28.83 27.07,28.83 27,28.9 J4.SH3 26.93,28.9 26.45,28.42 25.9,28.42 J4.A1_B12 | 31.57,29.04 31.57,30.7 31.02,31.26 30.74,31.26 D3.2 | 31.02,9.17 31.02,9.24 31.57,9.79 C20.2 | 31.02,9.17 31.02,7.99 C21.2 30.95,7.92 30.12,7.09 25.9,7.09 24.79,8.2 24.79,11.38 22.36,13.81 22.36,15.68 | J2.3 9.14,29.25 10.31,29.25 J2.5 10.38,29.25 10.8,29.25 11.28,29.73 17.24,29.73 | 26.86,9.93 27.07,9.93 IC3.9 | 26.86,9.93 26.66,9.93 IC3.8 | v35.8,27.17 36.42,27.8 36.63,27.8 C32.1 | v37.88,24.61 37.39,24.61 IC2.B3 | v29.15,10.28 29.43,10 29.43,9.79 R3.1 | v33.44,9.24 33.44,9.86 C8.2 | v35.52,9.24 35.94,9.65 35.94,9.86 C7.2
  Top 0.15: v26.86,9.38 26.86,9.93 | v28.39,8.96 27.42,7.99 C19.2 | 21.32,23.78 19.04,23.78 18.07,24.75 18.07,27.17 17.24,28 17.24,29.73 | 17.24,29.73 17.24,32.02 18.28,33.06 J4.SH2 | 21.32,23.78 C24.1 | v21.12,26.13 21.08,26.1 21.39,25.79 21.88,25.79 21.89,25.78 | J4.A12_B1 19.39,28.42 18.83,28.42 18.35,28.9 J4.SH4 | v31.09,9.17 31.02,9.17 | 30.95,15.95 U1.P$75 | 35.8,30.58 37.35,30.58 37.35,32.41 | 21.89,25.78 C23.1 21.32,23.78 | R2_USB.2 21.89,25.78 | D3.2 v28.35,31.28 | v28.35,32.78 J4.SH1
  Route63 0.15: v26.86,9.38 28.25,9.38 v29.15,10.28 | v28.35,31.28 v28.35,32.78
  Bottom 0.15: v23.82,5.01 20.63,5.01 19.87,4.25 v18.83,4.25 | v14.12,14.19 v14.12,13.32 14.19,13.32 15.92,11.59 v20.49,11.59 | v35.8,27.17 28.73,27.17 27,28.9 J4.SH3 | v37.88,24.61 37.88,24.4 36.98,23.5 36.98,16.23 36.63,15.88 34.55,15.88 U1.P$78 | 31.09,10.28 31.64,10.28 31.99,9.93 32.27,9.93 32.61,10.28 | 31.09,10.28 v29.15,10.28 29.15,10.21 28.39,9.44 v28.39,8.96 | 32.61,11.87 32.2,12.28 U1.P$88 | v33.44,9.24 v35.52,9.24 | v21.12,26.13 18.35,28.9 J4.SH4 | 31.09,10.28 v31.09,9.17
  pour GND (no thermals): 46.05,12.48 46.05,28.68 45.85,29.48 45.25,31.28 44.25,32.68 42.65,33.98 41.05,34.68 39.55,34.98 6.35,34.98 4.85,34.68 3.15,33.88 2.05,32.98 1.05,31.68 0.25,29.88 0.05,28.48 -0.05,26.58 -0.05,24.28 6.95,24.38 6.95,10.58 0.05,10.58 -0.05,6.68 0.45,4.58 1.05,3.28 1.95,2.08 2.85,1.38 4.05,0.68 5.75,0.08 8.15,-0.02 9.65,-0.02 9.65,1.78 14.35,1.78 14.35,-0.02 20.65,-0.02 20.65,1.78 25.35,1.78 25.35,-0.02 31.65,-0.02 31.65,1.78 36.35,1.78 36.35,-0.02 39.65,-0.02 41.55,0.38 43.25,1.38 44.75,2.98 45.65,4.78 45.95,6.08 46.05,6.98 46.05,7.48 43.15,7.48 43.15,12.48
HAPTIC_EN  (via drill 0.15)
  Top 0.15: v26.93,14.29 27.83,13.39 28.8,13.39 29.29,12.91 29.5,12.91 U1.P$U1 | v25.62,19.62 26.8,19.62 27.42,20.25 31.57,20.25 34.48,23.16 40.71,23.16 41.48,23.92 41.48,27.73 40.65,28.56 36.56,28.56 35.31,27.31 35.31,26.2 36.35,25.16 IC2.A1
  Bottom 0.15: v26.93,14.29 26.93,18.31 v25.62,19.62
IMU_INT1  (via drill 0.15)
  Top 0.15: v28.73,13.88 U1.P$N1 | v26.66,10.9 26.1,10.9 IC3.5
  Bottom 0.15: v28.73,13.88 28.73,13.14 26.66,11.07 v26.66,10.9
IMU_INT2  (via drill 0.15 pad 0.3)
  Top 0.15: v26.65,10.48 26.09,10.48 IC3.6
  Route63 0.15: U1.P$P2 29.3,14.33 28.6,14.33 28.25,13.98 28.25,10.78 27.95,10.48 v26.65,10.48
  other vias: 30,13.63
LX1  (via drill 0.15 pad 0.3)
  Top 0.15: IC9.B3 IC9.B2
  Top 0.3: v17.45,23.98 17.2,24.23 L7.1
  Route63 0.3: IC9.B3 17.92,23.51 v17.45,23.98
  other vias: 24.4,23.51
LX2  (via drill 0.15 pad 0.3)
  Top 0.15: IC9.D2 IC9.D3
  Top 0.3: v20.35,25.48 19.39,25.48 L7.2
  Route63 0.15: IC9.D3 24.4,25.11
  Route63 0.3: 24.4,25.11 22.8,26.71 20.68,26.71 20.35,26.38 v20.35,25.48
  other vias: 24.4,24.31
MOSI  (via drill 0.15 pad 0.3)
  Top 0.15: v9.75,17.18 10.15,16.78 J1.14
  Route63 0.15: U1.P$B13 32.75,20.78 34.05,22.08 34.05,29.18 33.95,29.28 29.15,29.28 26.25,26.38 26.25,22.88 23.85,20.48 19.75,20.48 16.35,17.08 16.35,16.48 10.45,16.48 v9.75,17.18
  other vias: 32.75,16.88
N$1
  Top 0.15: IC1.D1 35.38,30.7 35.38,29.8 35.31,29.73 R9.2
N$2  (via drill 0.15)
  Top 0.15: v35.59,16.65 35.52,16.58 35.52,16.16 U1.P$D23 | v38.15,13.04 37.95,13.04 37.81,12.91 37.39,12.91 37.11,13.18 37.11,13.32 C11.1
  Route63 0.15: v35.59,16.65 35.59,15.61 v38.15,13.04
N$3
  Top 0.15: IC9.D1 25.2,24.26 26.38,24.26 26.59,24.06 R4.2
N$4
  Top 0.15: IC9.E1 25.2,24.68 26.38,24.68 26.73,24.33 27.42,24.33 27.49,24.4 28.8,24.4 29.15,24.06 R2.2
N$5
  Top 0.15: U1.P$F2 29.98,15.68 29.63,15.68 29.57,15.75 29.22,15.75 28.6,15.12 26.93,15.12 C18.2 26.86,15.05 26.31,14.5 23.89,14.5 23.47,14.91 X2.2
N$6  (via drill 0.15 pad 0.3)
  Top 0.15: X2.1 23.47,17.48 24.03,18.03 26.45,18.03 27,17.48 C17.2 27.35,17.13 v27.35,16.58
  Route63 0.15: U1.P$D2 27.8,16.13 v27.35,16.58
  other vias: 30,16.13
N$7
  Top 0.15: R3.2 29.43,9.24 29.29,9.38 29.22,9.38 28.6,10 28.6,10.62 27.77,11.45 27.63,11.45 IC3.1
N$8
  Top 0.15: U1.P$C1 29.22,16.37 28.87,16.02 C5.1
N$9
  Top 0.15: U1.P$B3 30.26,16.92 30.26,17.62 31.09,18.45 L2.1
N$10
  Top 0.15: L2.2 32.13,18.52 32.13,19.97 32.54,20.39 L3.1
N$11
  Top 0.15: U1.P$A22 35.04,17.41 35.04,17.96 35.87,18.79 C12.1
N$12
  Top 0.15: U1.P$A18 34,17.41 34,18.03 33.17,18.86 33.17,19 C13.1
N$13
  Top 0.15: U1.P$A23 35.52,17.41 36.63,17.41 37.05,17.82 38.5,17.82 38.78,17.55 X1.3 39.05,17.13 39.05,17.04 39.08,16.71 39.12,16.71 39.61,16.71 39.75,16.58 40.3,16.58 C2.1
N$14
  Top 0.15: U1.P$B24 36.01,16.85 36.7,16.85 37.39,16.16 X1.1 37.6,15.95 37.11,15.47 37.11,14.57 C1.1
N$15  (via drill 0.15)
  Top 0.15: v35.59,14.64 35.52,14.71 35.52,15.12 U1.P$H23 | v39.05,10.21 39.05,7.78 40.37,6.47 40.37,6.33 C3.1 40.51,6.26 42.03,6.26 L1.1
  Route63 0.15: v35.59,14.64 35.59,13.67 v39.05,10.21
N$16
  Top 0.15: C22.1 40.65,3.56 40.92,3.56 41.2,3.84 42.52,3.84 C4.1 42.59,3.9 42.59,6.19 L1.2 42.59,6.26 43.01,6.68 44.35,6.68 ANT1.1 44.34,8.12
N$17
  Top 0.15: C9.1 36.98,12.5 36.98,12.56 36.7,12.84 36.7,13.18 U1.P$N24
N$18
  Top 0.15: C2-EP-DR.2 13.57,6.4 13.57,6.67 15.58,8.68 Q3.3 15.58,8.82 15.58,9.58 | 15.58,9.58 15.58,11.31 15.3,11.59 13.15,11.59 9.48,7.92 7.06,7.92 D5.2 | 15.58,9.58 18.49,9.58 L5.1
N$19
  Top 0.15: U1.P$AC5 30.74,11.31 29.5,11.31 27.83,12.98 26.31,12.98 25.06,11.73 25.06,8.34 26.03,7.37 27.97,7.37 29.43,8.82 30.19,8.82 30.6,9.24 30.6,9.79 C20.1
N$20
  Top 0.15: D2.1 15.72,3.14 12.53,6.33 C2-EP-DR.1 12.46,6.33 12.12,5.98 10.25,5.98 8.17,3.9 7.27,3.9 D4.2
N$21
  Top 0.15: R_TYPE_SEL.2 10.59,6.4 11.42,6.4 12.95,7.92 12.95,8.06 SJ1.2 12.88,8.06 12.88,10.76 13.08,10.97 13.15,10.97 13.29,11.11 R1_EP_DR.1
N$22
  Top 0.15: EPD_C2.2 12.46,23.16 12.25,23.16 10.94,21.84 10.52,21.84 J1.4
N$23
  Top 0.15: EPD_C7.2 12.46,18.17 12.46,17.68 11.63,16.85 11.63,16.09 11.35,15.82 11.35,14.85 10.8,14.29 10.52,14.29 J1.19
N$24
  Top 0.15: EPD_C1.2 12.53,22.05 11.56,22.05 10.8,21.29 10.52,21.29 J1.5
N$25
  Top 0.15: C32.2 37.05,27.8 37.05,25.3 36.91,25.16 IC2.A2
N$26
  Top 0.15: EPD_C12.2 12.39,12.14 11.14,12.14 10.8,11.8 10.52,11.8 J1.24
N$27
  Top 0.15: R2_USB.1 20.84,27.25 20.84,28.35 J4.B5
N$28
  Top 0.15: EPD_C8.2 12.46,16.85 12.46,16.51 11.63,15.68 11.63,14.64 10.8,13.81 10.52,13.81 J1.20
N$29
  Top 0.15: EPD_C10.2 12.46,14.43 10.87,12.84 10.52,12.84 J1.22
N$30
  Top 0.15: EPD_C6.2 12.53,19.48 12.53,19.28 12.85,18.96 12.85,18.78 12.05,18.78 12.05,17.68 11.35,17.68 11.35,16.23 11.08,15.95 11.08,15.05 10.87,14.85 10.52,14.85 J1.18
N$31
  Top 0.15: R1_USB.2 24.09,26.55 23.96,26.69 23.89,26.69 23.75,26.83 23.75,27.66 23.89,27.8 23.89,28.35 J4.A5
OUT+
  Top 0.15: IC2.A3 37.39,25.16 38.08,25.16 40.16,27.24 TP_OP.TP
OUT-
  Top 0.15: IC2.C3 37.39,24.12 39.95,24.12 40.16,24.33 TP_ON.TP
P1.01  (via drill 0.15 pad 0.3)
  Top 0.15: 18.9,15.19 18.9,16.51 Q1.1 | 18.9,15.19 R_PWR_EPD.1 | v17.65,15.18 17.66,15.19 18.9,15.19
  Route63 0.15: U1.P$Y23 36.1,12.13 39.65,8.58 41.25,8.58 41.25,16.88 42.75,16.88 42.75,7.38 41.75,6.38 22.45,6.38 19.95,3.88 17.65,6.18 v17.65,13.58
  Bottom 0.15: v17.65,13.58 v17.65,15.18
  other vias: 35.5,12.13
P1.02  (via drill 0.15)
  Top 0.15: SW_ENT.2 21.67,3.97 21.67,5.29 R8.1 21.74,5.36 22.85,5.36 22.92,5.43 C31.2 22.99,5.5 22.99,5.63 23.26,5.91 31.23,5.91 32.13,5.01 32.68,5.01 | 11.42,5.36 11.91,5.36 C30.2 | 11.42,5.36 10.87,5.36 R5.1 10.87,5.29 10.87,4.18 10.66,3.97 SW_UP.2 | v38.29,11.8 36.91,11.8 36.35,12.35 36.01,12.35 U1.P$W24 | v35.87,7.37 34,5.5 C29.2 34,5.43 32.96,5.43 R7.1 32.96,5.36 32.68,5.08 32.68,5.01 | 32.68,5.01 32.68,3.9 SW_DN.2 | v11.42,5.43 11.42,5.36
  Bottom 0.15: v38.29,11.8 38.29,9.79 v35.87,7.37 25.55,7.37 23.61,5.43 v11.42,5.43
PMIC_INT  (via drill 0.15, 0.15 pad 0.3)
  Top 0.15: v34.97,31.95 35.38,31.95 IC1.A1 | v34.9,8.13 v36.01,8.13
  Route63 0.15: U1.P$T2 29.25,11.98 | 29.25,11.98 28.55,11.98 | v31.64,8.27 31.64,8.96 31.5,9.1 31.5,9.72 29.29,11.94 29.25,11.98
  Bottom 0.15: v34.97,31.95 32.54,31.95 32.13,32.37 29.63,32.37 29.36,32.64 29.36,32.92 30.26,33.82 38.78,33.82 42.65,29.94 42.65,16.16 38.71,12.21 38.15,12.21 36.77,10.83 36.77,8.89 v36.01,8.13 | v34.9,8.13 31.78,8.13 v31.64,8.27
  other vias: 30,13.13
PREVGH
  Top 0.15: EPD_C9.2 12.46,15.68 12.46,15.33 11.91,14.78 11.91,14.36 10.87,13.32 10.52,13.32 J1.21 10.45,13.25 10.11,13.25 9.9,13.04 9.9,12.08 5.74,7.92 3.6,7.92 D5.1
PREVGL
  Top 0.15: J1.23 10.52,12.28 10.8,12.28 11.77,13.25 12.39,13.25 EPD_C11.2 12.46,13.32 13.02,13.88 13.71,13.88 13.78,13.81 14.26,13.81 14.54,14.08 19.25,14.08 20.98,12.35 20.98,6.67 19.32,5.01 19.32,3.21 D2.2
RESE  (via drill 0.15)
  Top 0.15: 13.92,10.62 14.68,10.62 14.88,10.83 Q3.2 | 13.92,10.62 13.36,10.62 R1_EP_DR.2 | v9.76,21.42 9.76,21.91 10.11,22.26 10.45,22.26 J1.3 | 13.92,10.62 v13.92,11.11
  Bottom 0.15: v9.76,21.42 9.76,19.55 13.64,15.68 13.64,11.38 v13.92,11.11
RESET  (via drill 0.15, 0.15 pad 0.3)
  Top 0.15: v30.4,33.41 29.29,34.51 14.05,34.51 10.38,30.84 10.38,30.57 J2.6 | v42.15,16.19 42.15,15.05 TP_RESET.TP
  Route63 0.15: U1.P$AC13 34.65,11.38 34.95,11.08 36.05,11.08 39.25,7.88 42.35,7.88 42.35,16 v42.15,16.19 | v41.34,17.68 41.34,18.31 38.29,21.36 38.29,22.67 34.34,26.62 34.34,29.32 32.34,31.33 32.06,31.33 30.4,32.99 v30.4,33.41
  Bottom 0.15: v41.34,17.68 42.1,16.92 42.1,16.23 v42.15,16.19
  other vias: 32.75,11.38
SCK  (via drill 0.15)
  Top 0.15: v27.42,19.62 27.63,19.83 30.67,19.83 31.57,18.93 31.57,18.17 31.78,17.96 31.92,17.96 32.48,17.41 U1.P$A12 | v23.13,19.69 14.19,19.69 13.85,20.04 12.18,20.04 11.7,19.55 11.7,18.43 11.08,17.81 11.08,17.55 10.87,17.34 10.52,17.34 J1.13
  Route63 0.15: v27.42,19.62 26.59,19.62 25.96,19 23.82,19 v23.13,19.69
SCL  (via drill 0.15, 0.15 pad 0.3)
  Top 0.15: 34.83,24.12 36.35,24.12 IC2.C1 | 34.83,24.12 32.27,21.56 30.88,21.56 TP_SCL.TP | R17.2 23.75,21.29 25.13,21.29 27.35,23.5 R4.1 27.83,23.57 v28.53,23.57 | v34.9,31.47 35.38,31.47 IC1.B1 | v36.28,30.08 37.74,30.08 38.36,29.46 41.06,29.46 41.41,29.8 41.41,30.08 U3.7 | 27.63,10.9 27.83,10.9 28.11,10.62 v28.11,10.07 | 27.63,10.9 IC3.12 | v34.83,24.2 34.83,24.12 | v27.05,10.88 27.63,10.9
  Route63 0.15: U1.P$M2 29.35,14.68 27.55,14.68 27.15,13.48 27.15,12.28 v27.05,10.88
  Bottom 0.15: v36.28,30.08 35.49,30.88 | 35.49,30.88 v34.9,31.47 | v28.11,10.07 28.11,9.31 27.9,9.1 27.9,8.82 28.25,8.47 29.08,8.47 29.29,8.68 35.59,8.68 36.01,9.1 36.01,10.41 35.04,11.38 35.04,11.54 35.24,11.74 35.24,13.67 37.39,15.82 37.39,23.5 38.36,24.47 38.36,25.3 36.46,27.21 | 36.46,27.21 34.27,29.39 34.27,29.66 35.49,30.88 | v28.53,23.57 32.82,23.57 34.14,24.89 | 36.46,27.21 34.14,24.89 | 34.14,24.89 v34.83,24.2
  other vias: 30,14.13
SDA  (via drill 0.15, 0.15 pad 0.3)
  Top 0.15: v27.83,14.02 28.18,14.36 29.5,14.36 U1.P$L1 | v27.56,12.59 26.64,12.59 26.64,12.34 27.1,11.88 IC3.2 | 26.31,20.73 27.49,20.73 28.25,21.49 TP_SDA.TP 28.32,21.56 28.32,22.53 29.22,23.43 R2.1 29.22,23.57 29.36,23.57 29.63,23.85 29.63,25.72 30.54,26.62 31.78,26.62 34.34,29.18 34.34,29.53 | 26.31,20.73 25.83,20.73 R18.2 | 26.31,20.73 v26.31,20.18 | 34.34,29.53 34.34,30.08 35.31,31.05 35.38,31.05 IC1.C1 | v37.67,29.18 41.34,29.18 41.89,29.73 41.89,30.08 U3.8 | 34.34,29.53 v34.76,29.53
  Route63 0.15: IC2.B2 37.55,25.98 v37.67,29.18
  Bottom 0.15: v27.56,12.59 27.83,12.87 v27.83,14.02 27.83,17.89 26.31,19.42 v26.31,20.18 | v37.67,29.18 35.11,29.18 v34.76,29.53
  other vias: 36.87,24.64
SWDCLK  (via drill 0.15)
  Top 0.15: U1.P$AA24 36.01,11.87 36.42,11.87 36.98,11.31 38.43,11.31 41.34,14.22 41.34,16.16 42.65,17.48 TP_SWDCLK.TP 42.65,17.55 v41.34,18.86 | v29.77,32.78 28.32,34.24 18,34.24 13.85,30.08 11.21,30.08 11.01,29.87 10.11,29.87 9.48,30.5 9.14,30.5 J2.4
  Bottom 0.15: v29.77,32.78 35.11,32.78 36.21,31.67 36.21,31.33 40.99,26.55 41.27,26.55 41.34,26.53 v41.34,18.86
SWDIO  (via drill 0.15)
  Top 0.15: v36.49,11.17 36.35,11.31 36.01,11.31 U1.P$AC24 | v40.37,17.96 40.37,18.52 TP_SWDIO.TP | v8.24,29.87 7.82,30.29 7.82,30.5 J2.2
  Bottom 0.15: v40.37,17.96 36.49,14.08 v36.49,11.17 36.49,9.17 34.97,7.64 16.34,7.64 8.17,15.82 8.17,27.66 8.24,27.73 v8.24,29.87
SWO  (via drill 0.15)
  Top 0.15: v35.52,11.52 35.04,11.04 35.04,10.9 U1.P$AD22 | v37.88,21.29 38.43,21.29 39.05,20.66 TP_SWO.TP
  Bottom 0.15: v37.88,21.29 37.88,15.88 36.21,14.22 36.21,12.21 v35.52,11.52
VBAT  (via drill 0.15, 0.15 pad 0.3)
  Top 0.15: 35.87,31.12 IC1.C2 | C37.2 38.09,30.95 v38.05,30.98
  Top 0.2: v36.98,31.12 35.87,31.12
  Top 0.3: v38.71,32.85 40.58,32.85 40.85,32.57 | 40.85,32.57 40.85,32.09 U3.3 41.06,32.09 41.41,32.09 U3.2 | C27.2 44.04,30.91 42.17,32.78 41.13,32.78 40.99,32.64 40.85,32.57 | TP_VBAT.TP 43.07,27 v41.79,28.28 | v36.95,31.78 36.98,31.75 v36.98,31.12
  Route63 0.15: v38.05,30.98 37.25,31.78 v36.95,31.78
  Bottom 0.3: v38.71,32.85 37.49,31.64 | 37.49,31.64 v36.98,31.12 | v41.79,28.28 40.85,28.28 37.49,31.64
VBUS  (via drill 0.15)
  Top 0.2: 35.87,31.95 IC1.A2
  Top 0.3: 35.87,32.44 35.87,31.95 | 35.87,32.44 36.14,32.71 C38.2 | 32.34,31.81 32.34,32.71 32.48,32.85 33.93,32.85 34.27,32.51 35.73,32.51 35.87,32.44 | 32.34,31.81 32.82,31.33 33.17,31.33 D3.5 | v28.94,11.24 29.29,10.9 29.98,10.9 U1.P$AD2 | v28.32,26.13 30.4,28.21 C42.1 30.6,28.28 30.67,28.28 30.81,28.42 31.57,28.42 C43.1 | v29.36,8.13 29.5,7.99 29.98,7.99 C21.1 | v20.7,29.32 20.29,28.9 20.29,28.42 J4.A9_B4 | v24.58,29.32 25,28.9 25,28.42 J4.A4_B9 | v32.2,31.74 32.34,31.81 | v25.55,8.54 25.55,9.51 v25.48,9.58
  Route63 0.3: v29.36,8.13 29.36,9.58 29.84,10.07 29.84,10.48 29.08,11.24 v28.94,11.24
  Bottom 0.3: 29.77,18.03 27.63,20.18 27.63,25.37 | 27.63,25.37 27.63,25.44 v28.32,26.13 | v20.7,29.32 20.7,27.31 22.23,25.79 22.23,24.61 | 27.63,25.37 26.66,25.37 26.59,25.51 25.38,26.72 | 25.38,26.72 24.58,27.52 v24.58,29.32 24.51,29.46 26.8,31.74 v32.2,31.74 | 25.38,26.72 22.99,24.33 22.57,24.33 22.36,24.54 22.23,24.61 | v29.36,8.13 29.29,8.13 29.22,8.06 26.03,8.06 v25.55,8.54 | v25.48,9.58 19.73,15.33 19.73,22.26 22.09,24.61 22.23,24.61
VREG  (via drill 0.15, 0.15 pad 0.3)
  Top 0.15: 24.79,23.09 24.44,23.09 IC9.A3 24.3,23.09 23.96,23.09 | 24.79,23.09 IC9.A2 | 24.79,23.09 25.13,23.09 IC9.A1 | v22.78,25.79 22.36,25.79 C23.2
  Top 0.3: 22.78,24.2 v22.78,24.82 | 22.78,24.2 22.36,23.78 C24.2 22.29,23.64 21.67,23.02 21.67,22.05 TP_VREG.TP | 23.96,23.09 22.92,24.12 22.78,24.2 | v30.19,34.3 36.49,34.3 38.5,32.3 38.5,32.23 38.85,31.88 C39.1 v39.65,31.78
  Route63 0.15: 36.75,30.28 IC1.B2
  Route63 0.3: v39.65,31.78 38.65,30.28 36.75,30.28
  Bottom 0.3: v22.78,24.82 v22.78,25.79 22.85,25.93 22.85,30.57 26.59,34.3 v30.19,34.3
  other vias: 35.82,31.51